# EAGLE board shapeTest3 (EAGLE 7.2.0)

No outline drawn. Coordinates in mm, seen from the top.
Copper layers (1*16): Top 0.035mm / dielectric 1.5mm / Bottom 0.035mm
Design rules "default *": minimum track width 10mil, minimum drill 0.6mm, track to track 8mil, track to pad 8mil, pad to pad 8mil, via to via 8mil, smd to smd 8mil, copper to edge 40mil, drill to drill 8mil, minimum pad ring 10mil, minimum via ring 8mil, stop-mask expansion 4mil, vias tented up to drill 0mil, thermal gap 10mil

## Footprints (pad centres in the part's own frame; a part is rotated, then mirrored left to right if it is on the bottom)
TEST1 = smd 3 x 4 bottom: P$1 -2,-3 | smd 2 x 4: P$2 2,3 | drill 1 square: P$3 -2,2 | drill 1: P$4 2,-2 | hole 1.1: -1,5 | hole 0.6: -5,4

## Placement (x,y rotation side)
U$1  TEST1  [TEST1]  0,0 25 top

## Library data of the parts
U$1 = shapeTest1